# Altium PCB class-sensor.PcbDoc (part 2 of 2)
Units mm, origin at the board's own origin, x right, y up, seen from the top; angles counter-clockwise.
Board outline 152.4 x 135.3 mm, 2 copper layers (Top Layer, Bottom Layer); 48 components, 76 nets, 317 pads, 56 vias.
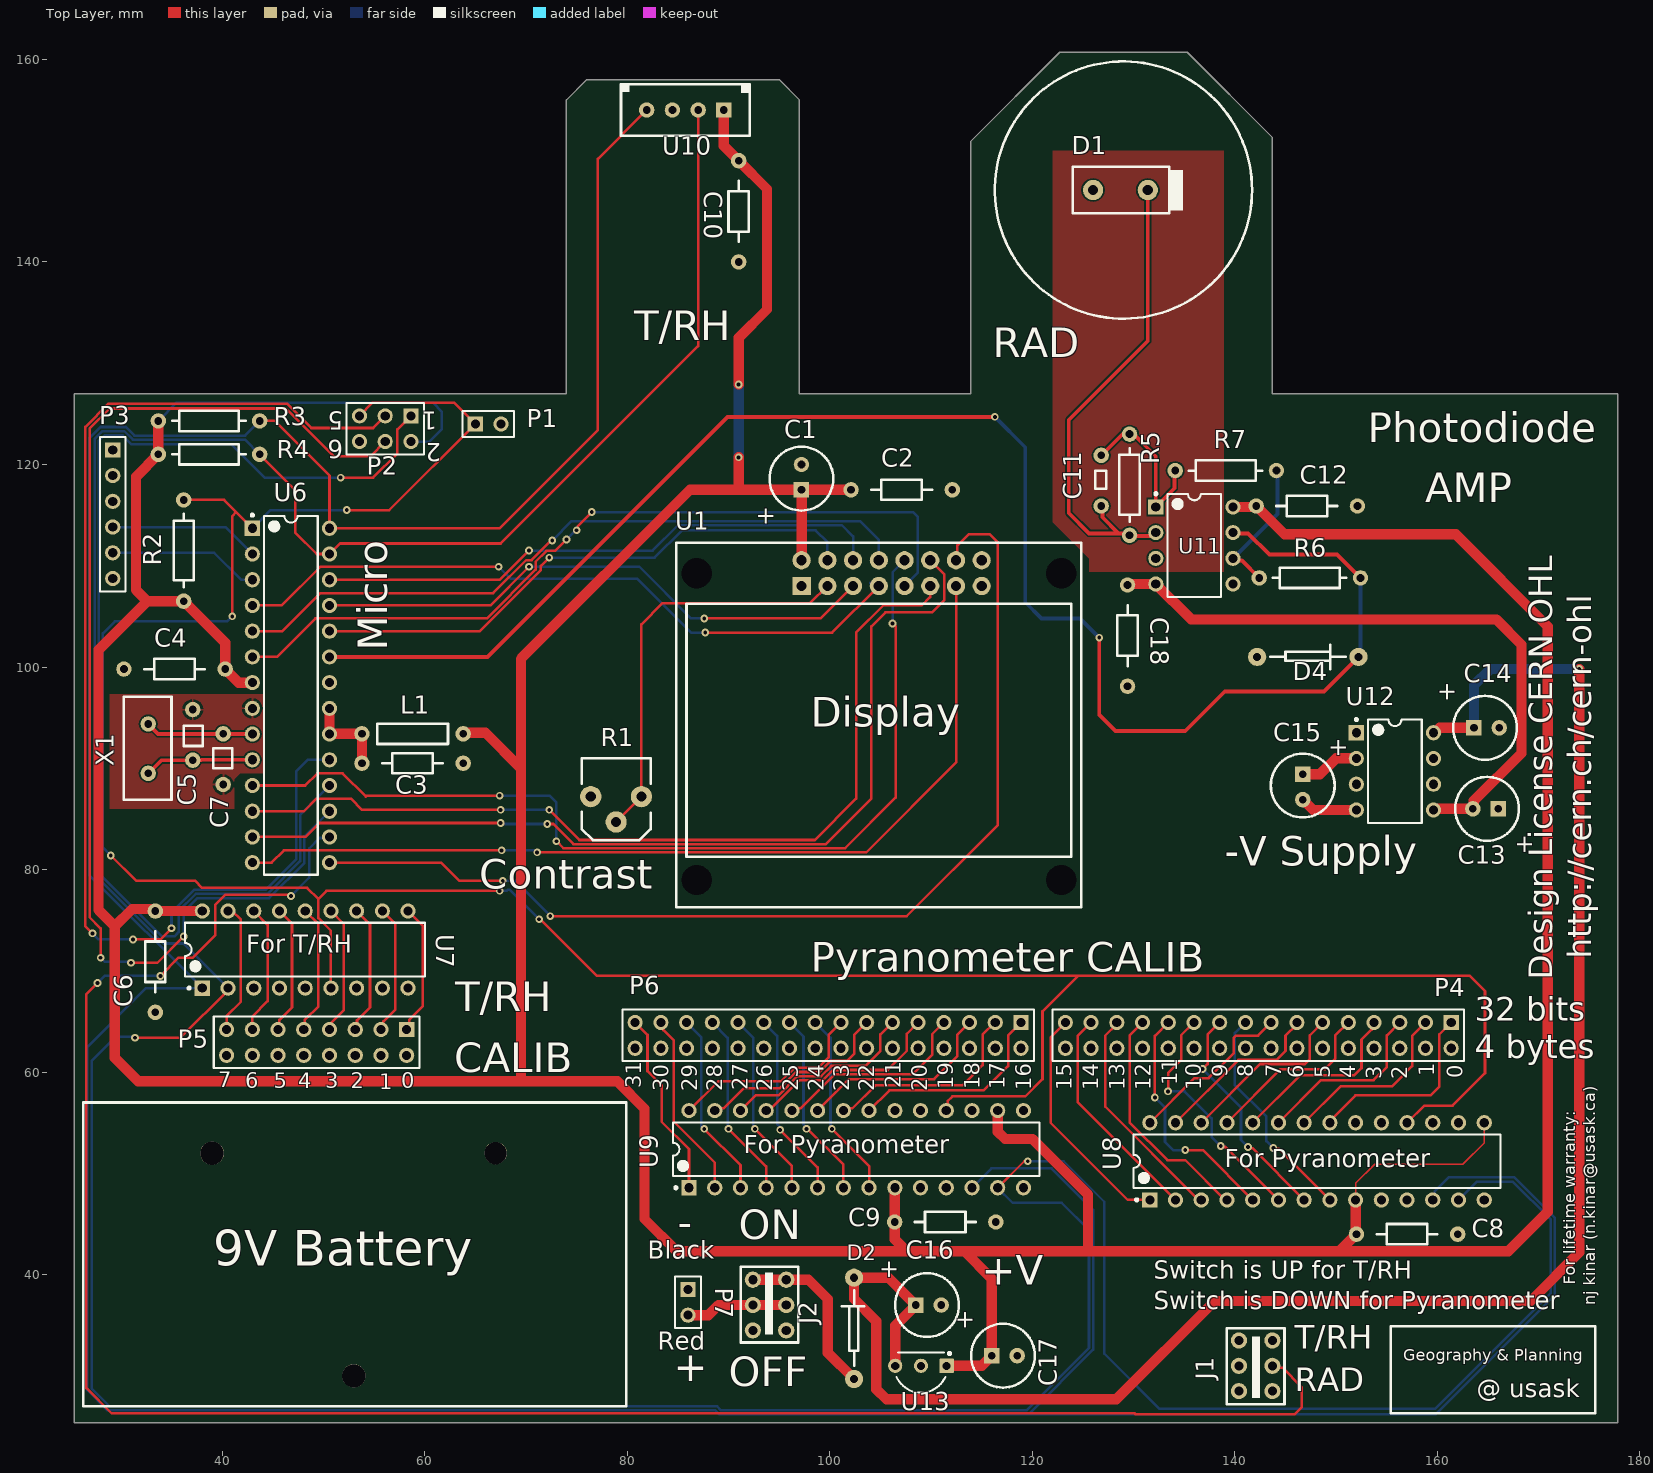
[diagram p0: Top Layer view]

## Part data (continued)
U8 U9: library part CMP-0186-00081-2, "16-Bit I/O Expander with Serial Interface, 28-Pin SPDIP, Extended Temperature", Case/Package=DIP, Frequency=1.7MHz, Manufacturer=Microchip, Max Operating Temperature=125°C, Max Supply Voltage=5.5V, Min Operating Temperature=-40°C, Min Supply Voltage=1.8V, Nominal Supply Current=1mA, Supplier Part Number 1=MCP23017-E/SP-ND, ComponentLink1Description="Manufacturer URL", ComponentLink1URL=http://www.microchip.com/, ComponentLink2Description=Datasheet, ComponentLink2URL=http://ww1.microchip.com/downloads/en/DeviceDoc/21952b.pdf, ComponentLink3Description="Package Specification", ComponentLink3URL=http://www.microchip.com/stellent/groups/techpub_sg/documents/packagingspec/en012702.pdf, ComponentLink4Description=https://datasheet.ciiva.com/1495/12179-1495877.pdf?src-supplier=Element14, ComponentLink4URL=https://datasheet.ciiva.com/1495/12179-1495877.pdf?src-supplier=Element14, ComponentLink5Description=https://datasheet.ciiva.com/3149/21952b-3149159.pdf?src-supplier=Avnet, ComponentLink5URL=https://datasheet.ciiva.com/3149/21952b-3149159.pdf?src-supplier=Avnet, ComponentLink6Description=https://datasheet.ciiva.com/16350/filehandler-aspxddocname-en023709-16350808.pdf?src-supplier=Future+Electronics, ComponentLink6URL=https://datasheet.ciiva.com/16350/filehandler-aspxddocname-en023709-16350808.pdf?src-supplier=Future+Electronics, ComponentLink7Description=https://datasheet.ciiva.com/18405/70046137-18405547.pdf?src-supplier=Allied+Electronics, ComponentLink7URL=https://datasheet.ciiva.com/18405/70046137-18405547.pdf?src-supplier=Allied+Electronics, ComponentLink8Description=https://datasheet.ciiva.com/1780/21952b-1780556.pdf?src-supplier=Digi-Key, ComponentLink8URL=https://datasheet.ciiva.com/1780/21952b-1780556.pdf?src-supplier=Digi-Key, DatasheetVersion="revB, Feb-2007", Interface=I2C,Serial, Lead Free="Lead Free", Manufacturer Part Number=MCP23017-E/SP, Max Frequency=1.7MHz, Mount="Through Hole,Surface Mount", Number of Bits=16, Number of Channels=1, Number of I/Os=16, Number of Pins=28, PackageDescription="28-Lead Skinny Plastic Dual In-Line (SP) - 300 mil Body [SPDIP]", PackageReference=SPDIP300-SP28, PackageVersion="revBB, Aug-2009", Packaging=Rail/Tube, Pricing 1="1=1.24000, 25=1.03000, 100=0.93730 (USD)", REACH SVHC="No SVHC", RevisionNote="URLs added.", RoHS=Yes, Stock 1=2595, Supplier 1=Digi-Key
U10: "Humidity Temperature Sensor 10 ~ 99% RH I²C ±3% RH 5s Through Hole", Manufacturer=Pimoroni, Manufacturer Part Number=COM1700, Supplier Part Number 1=1778-1179-ND, Pricing 1="1=3.76000 (USD)", RoHS=No, Stock 1=149, Supplier 1=Digi-Key
U11: library part CMP-0017-00928-2, "Dual Low-Noise JFET-Input General-Purpose Operational Amplifier, 7 to 36 V, -40 to 85 degC, 8-pin DIP (P8), Pb-Free (RoHS)", Case/Package=P, Dual Supply Voltage=9V, Input Bias Current=200pA, Input Offset Voltage (Vos)=6mV, Manufacturer="Texas Instruments", Max Dual Supply Voltage=18V, Max Operating Temperature=85°C, Min Dual Supply Voltage=3.5V, Min Operating Temperature=-40°C, Nominal Supply Current=5mA, Operating Supply Current=1.4mA, Package Quantity=50, Rating=Catalog, Supplier Part Number 1=296-14997-5-ND, Total Supply Voltage(Max)(+5V is 5, +/-5V is 10)=36, Total Supply Voltage(Min)(+5V is 5, +/-5V is 10)=7, Voltage Gain=106.02dB, Bandwidth=3MHz, CMRR(Min)(dB)=75, Code_JEDEC=MS-001, Common Mode Rejection Ratio=75dB, ComponentLink1Description="Manufacturer URL", ComponentLink1URL=http://www.ti.com/, ComponentLink2Description=Datasheet, ComponentLink2URL=http://www.ti.com/lit/ds/symlink/tl072.pdf, ComponentLink3Description="Package Specification", ComponentLink3URL=http://www.ti.com/litv/pdf/mpdi001b, ComponentLink4Description=https://datasheet.ciiva.com/26847/tl072ip-26847615.pdf?src-supplier=IIIC, ComponentLink4URL=https://datasheet.ciiva.com/26847/tl072ip-26847615.pdf?src-supplier=IIIC, ComponentLink5Description=https://datasheet.ciiva.com/2974/tl074-2974210.pdf?src-supplier=Avnet, ComponentLink5URL=https://datasheet.ciiva.com/2974/tl074-2974210.pdf?src-supplier=Avnet, ComponentLink6Description=https://datasheet.ciiva.com/7738/1847488-7738549.pdf?src-supplier=Element14, ComponentLink6URL=https://datasheet.ciiva.com/7738/1847488-7738549.pdf?src-supplier=Element14, ComponentLink7Description=https://datasheet.ciiva.com/26244/tl074-26244104.pdf?src-supplier=Avnet+Europe, ComponentLink7URL=https://datasheet.ciiva.com/26244/tl074-26244104.pdf?src-supplier=Avnet+Europe, ComponentLink8Description=https://datasheet.ciiva.com/1797/tl071a-1797084.pdf?src-supplier=Digi-Key, ComponentLink8URL=https://datasheet.ciiva.com/1797/tl071a-1797084.pdf?src-supplier=Digi-Key, DatasheetVersion=SLOS080J, Eco-Plan="Pb-Free (RoHS)", Gain Bandwidth Product=3MHz, GBW(Typ)(MHz)=3, Height=4.57mm, IIB(Max)(pA)=200, Iq per channel(Max)(mA)=2.5, Lead Free="Lead Free", Length=9.81mm, Manufacturer Part Number=TL072IP, Max I/O Voltage=6mV, Mounting Technology="Through Hole", Nominal Gain Bandwidth Product=3MHz, Number of Amplifiers=2, Number of Channels=2, Number of Circuits=2, Number of Elements=2, Number of Pins=8, Offset Drift(Typ)(uV/C)=18, Operating Supply Voltage=18V, PackageDescription="8-Pin Plastic In-Line, Body 9.59 x 6.35 mm, Pitch 2.54 mm", PackageReference=P0008A, PackageVersion="4040082/E, 04/2010", Packaging=Rail/Tube, PartNumber=TL072IP, Pricing 1="1=0.69000, 10=0.60700, 25=0.57040, 100=0.46550, 500=0.36800, 1000=0.29440, 2500=0.26680, 5000=0.24840 (USD)", Radiation Hardening=No, REACH SVHC="No SVHC", RoHS=Yes, Slew Rate=13V/µs, Slew Rate(Typ)(V/us)=13, Stock 1=1917, Sub Family="General Purpose Amplifier, High Supply Voltage Amplifier (>=30V)", Supplier 1=Digi-Key, Unity Gain Bandwidth Product=3MHz, Vio (25C)(Max)(mV)=6, Vn at 1kHz(Typ)(nV/rtHz)=18, Width=6.35mm
U12: library part CMP-0065-00002-3, "Switched Capacitor Voltage Converter, 8-pin MDIP, Pb-Free", Case/Package=PDIP, Frequency=10kHz, Manufacturer="Texas Instruments", Max Input Voltage=10V, Max Operating Temperature=85°C, Max Output Voltage=-1.5V, Min Input Voltage=1.5V, Min Operating Temperature=-40°C, Min Output Voltage=-10V, Operating Supply Current=200uA, Output Power=1.4W, PackageTopMarking=NSUZXYTTE#*LMC*7660IN, PowerWise=N, Quiescent Current=120uA, Supplier Part Number 1=LMC7660IN/NOPB-ND, Code_JEDEC=MS-001-BA, ComponentLink1Description="Datasheet URL", ComponentLink1URL=http://www.ti.com/general/docs/lit/getliterature.tsp?genericPartNumber=LMC7660&fileType=pdf, ComponentLink2Description=https://datasheet.ciiva.com/25627/0900766b80b14545-25627686.pdf?src-supplier=RSComponents, ComponentLink2URL=https://datasheet.ciiva.com/25627/0900766b80b14545-25627686.pdf?src-supplier=RSComponents, ComponentLink3Description=https://datasheet.ciiva.com/41458/001014234-da-01-en-ic-reg-switche-lmc7660in-nopb-pdip-8-tid-41458595.pdf?src-supplier=Conrad, ComponentLink3URL=https://datasheet.ciiva.com/41458/001014234-da-01-en-ic-reg-switche-lmc7660in-nopb-pdip-8-tid-41458595.pdf?src-supplier=Conrad, ComponentLink4Description=https://datasheet.ciiva.com/6598/lmc7660-6598038.pdf?src-supplier=Digi-Key, ComponentLink4URL=https://datasheet.ciiva.com/6598/lmc7660-6598038.pdf?src-supplier=Digi-Key, CompType="Switch Caps", Height=3.3mm, Lead Free="Lead Free", Length=9.27mm, Logic Function=Inverting, Manufacturer Part Number=LMC7660IN/NOPB, Max Supply Voltage=10V, Min Supply Voltage=1.5V, Mount="Through Hole", Number of Outputs=1, Number of Pins=8, Output Type=Adjustable, Output Voltage=-10V, PackageDescription="MDIP, .365 x .250 x .130in, 8 Lead, .100in Pitch", PackageReference=P0008A, Packaging=Rail/Tube, PinCount=8, Pricing 1="1=1.29000, 10=1.15100, 25=1.09200, 100=0.89700, 500=0.74100, 1000=0.58500, 2500=0.54600, 5000=0.51870 (USD)", Radiation Hardening=No, REACH SVHC="No SVHC", RoHS=Y, Stock 1=2555, Supplier 1=Digi-Key, Switching Frequency=10kHz, Termination="Through Hole", Weight=0.015521oz, Width=6.35mm
U13: library part CMP-0758-00015-2, "Single Output LDO, 100 mA, Fixed 5 V Output, 5.4 to 30 V Input, 3-Pin TO-92 (LP), RoHS, Tape and Reel", Case/Package=TO-92, Dropout Voltage=380mV, Input Bias Current=75uA, Manufacturer="Texas Instruments", Max Input Voltage=30V, Max Operating Temperature=125°C, Max Output Current=100mA, Max Output Voltage=5.05V, Min Input Voltage=5.4V, Min Operating Temperature=-40°C, Min Output Voltage=4.95V, Min Supply Voltage=2V, Nominal Output Voltage=5V, Output Capacitor Type=Non-Ceramic, Output Voltage Accuracy=1.4%, Package Quantity=1, Rating=Catalog, Supplier Part Number 1=296-20933-1-ND, Accuracy=1.4%, Accuracy (%)=1.4, ComponentLink1Description="Manufacturer URL", ComponentLink1URL=http://www.ti.com/, ComponentLink2Description=Datasheet, ComponentLink2URL=http://www.ti.com/lit/ds/symlink/lp2950-30.pdf, ComponentLink3Description="Package Specification", ComponentLink3URL=http://www.ti.com/lit/ml/msot002c/msot002c.pdf, ComponentLink4Description=https://datasheet.ciiva.com/2041/lp2951-2041968.pdf?src-supplier=Digi-Key, ComponentLink4URL=https://datasheet.ciiva.com/2041/lp2951-2041968.pdf?src-supplier=Digi-Key, ComponentLink5Description=https://datasheet.ciiva.com/3223/lp2951-33-3223814.pdf?src-supplier=Avnet, ComponentLink5URL=https://datasheet.ciiva.com/3223/lp2951-33-3223814.pdf?src-supplier=Avnet, ComponentLink6Description=https://datasheet.ciiva.com/1511/1864445-1511850.pdf?src-supplier=Element14, ComponentLink6URL=https://datasheet.ciiva.com/1511/1864445-1511850.pdf?src-supplier=Element14, ComponentLink7Description=https://datasheet.ciiva.com/46448/1445037-46448763.pdf?src-supplier=Element14, ComponentLink7URL=https://datasheet.ciiva.com/46448/1445037-46448763.pdf?src-supplier=Element14, ComponentLink8Description=https://datasheet.ciiva.com/2041/lp2951-2041966.pdf?src-supplier=Digi-Key, ComponentLink8URL=https://datasheet.ciiva.com/2041/lp2951-2041966.pdf?src-supplier=Digi-Key, ComponentLink9Description=https://datasheet.ciiva.com/2041/lp2951-2041967.pdf?src-supplier=Digi-Key, ComponentLink9URL=https://datasheet.ciiva.com/2041/lp2951-2041967.pdf?src-supplier=Digi-Key, Contact Plating=Tin,Matte, DatasheetVersion=SLVS582H, Fixed Output Options (V)=5, Height=3.68mm, Iout (Max) (A)=0.1, Iq (Typ) (mA)=0.075, Lead Free="Lead Free", Length=4.83mm, Manufacturer Part Number=LP2950-50LPRE3, Mounting Technology="Through Hole", Number of Outputs=1, Number of Pins=3, Number of Regulators=1, Output Current=100mA, Output Options="Fixed Output", Output Type=Fixed, Output Voltage=5V, PackageDescription="3-Pin Plastic Cylindrical Package, Body Dia 4.825 mm, Pitch 2.65 mm", PackageReference=LP0003A, PackageVersion=4040001-2/E, Packaging="Tape and Reel", Packing="Tape and Reel", PartNumber=LP2950-50LPRE3, Polarity=Positive, Pricing 1="1=0.47000, 10=0.40200, 100=0.29990, 500=0.23566, 1000=0.18210 (USD)", Quiescent Current=75uA, Radiation Hardening=No, REACH SVHC="No SVHC", RoHS=TRUE, Stock 1=99647, Supplier 1=Digi-Key, Termination="Through Hole", Vdo (Typ) (mV)=380, Vin (Max) (V)=30, Vin (Min) (V)=5.4, Vout (Max) (V)=5.05, Vout (Min) (V)=4.95, Width=3.43mm
X1: "CRYSTAL 8.0000MHZ 18PF T/H", ESR (Equivalent Series Resistance)=60R, Frequency=8MHz, Frequency Stability=50ppm, Frequency Tolerance=30ppm, Load Capacitance=18pF, Manufacturer=CTS, Max Operating Temperature=85°C, Min Operating Temperature=-40°C, Package Quantity=100, Supplier Part Number 1=CTX917-ND, ComponentLink1Description=https://datasheet.ciiva.com/859/008-0309-0-859649.pdf?src-supplier=Digi-Key, ComponentLink1URL=https://datasheet.ciiva.com/859/008-0309-0-859649.pdf?src-supplier=Digi-Key, ComponentLink2Description=https://datasheet.ciiva.com/3176/008-0309-0-3176342.pdf?src-supplier=Avnet, ComponentLink2URL=https://datasheet.ciiva.com/3176/008-0309-0-3176342.pdf?src-supplier=Avnet, ComponentLink3Description=https://datasheet.ciiva.com/4945/008-0309-0-32667-4945355.pdf?src-supplier=Mouser, ComponentLink3URL=https://datasheet.ciiva.com/4945/008-0309-0-32667-4945355.pdf?src-supplier=Mouser, Contact Plating=Copper,Tin,Silver, Height=0.145inch, Length=0.427inch, Manufacturer Part Number=ATS080B-E, Mount="Through Hole", Number of Pins=2, Packaging=Bulk, Pricing 1="1=0.38000, 10=0.31500, 50=0.28360, 100=0.25200, 500=0.23940, 1000=0.20160, 2500=0.18900, 5000=0.18270, 10000=0.17640 (USD)", RoHS=Yes, Stock 1=29517, Supplier 1=Digi-Key, Termination=Radial, Tolerance=30ppm, Width=0.177inch

## Free pads (board coordinates)
  round 2.3 hole 2.3: H(39,52) H(53,30)
  round 2.2 hole 2.2: H(67,52)

## Via types
v1: diameter 0.762, hole 0.381, Top Layer to Bottom Layer, tented both sides, 56 vias

## Nets (pads, with @x,y where several pads share a name; then routed paths per layer and width w, separated by ;. In a path a pad name is that pad's centre, name@x,y a point inside that pad or via, vN(x,y) a via of type N, cw(c..) or ccw(c..) an arc to the next point about the centre after c; other vN are vias at no path point)
5V: C1.1 C2.2 C4.2 C6.2 C8.2 C9.2 C10.2 C12.2 C17.1 L1.1 P2.2 R2.2 R3.2 R4.2 U1.2 U6.7 U7.18 U8.9 U8.15 U9.9 U9.16 U10.1 U11.8 U13.1 | length 579.5
  Top Layer w0.152: U8.9 151.92,49.02 153.8,50.9 162.5,50.9 164.637,53.037 164.637,53.163 164.62,53.18 U8.15
  Top Layer w1.016: C6.2 C6.2@33.563,75.9 ; C6.2@33.663,75.8 C6.2@33.563,75.9 ; R3.2 R4.2 31.5,118.8 31.5,107.6 32.6,106.5 ; U7.18 38.03,75.9 C6.2@33.563,75.9 ; U6.7 41.64,98.46 C4.2 40.3,102.4 R2.2 32.6,106.5 ; L1.1 63.897,93.497 64.256,93.497 64.259,93.5 66,93.5 69.5,90 ; U10.1 89.54,151.46 C10.2 93.8,147.2 93.8,135.3 91,132.5 v1(91,127.9) ; v1(91,120.7) 91,117.5 ; U1.2 97.22,117.28 C1.1@97,117.5 ; C2.2 C1.1@97,117.5 ; U9.9 106.42,45.22 C9.2 106.4,43.5 107.6,42.3 ; U13.1 115,31 C17.1 116,39.6 113.3,42.3 ; U9.16 116.58,54.12 117.3,53.4 120,53.4 125.5,47.9 125.5,42.3 ; U11.8 142.01,115.81 C12.2 144.9,113.1 161.8,113.1 170.9,104 170.9,46.2 167,42.3 150.3,42.3 ; U8.9 151.92,44.08 C8.2 150.3,42.3 ; 29.4,74.4 27.8,76 27.8,101.7 32.6,106.5 ; 29.4,74.4 29.4,61.4 31.7,59.1 69.5,59.1 ; 29.4,74.4 31.1,76.1 33.363,76.1 C6.2@33.563,75.9 ; 69.5,59.1 79,59.1 81.7,56.4 81.7,45.5 84.9,42.3 107.6,42.3 ; 69.5,59.1 69.5,90 ; 69.5,90 69.5,100.8 86.2,117.5 91,117.5 ; 91,117.5 C1.1@97,117.5 ; 107.6,42.3 113.3,42.3 ; 113.3,42.3 125.5,42.3 ; 125.5,42.3 150.3,42.3
  Bottom Layer w0.254: R3.2 35.5,126.1 60.8,126.1 61.7,125.2 61.7,123.5 60.46,122.26 P2.2
  Bottom Layer w1.016: v1(91,120.7) v1(91,127.9)
9V: C14.1 C16.1 D2.2 U12.8 U13.3 | length 178.9
  Top Layer w1.016: U13.3 106.46,34.96 C16.1 105.8,39.7 D2.2 102.4,37.6 104.6,35.4 104.6,28.7 105.6,27.7 128.3,27.7 138,37.4 169.2,37.4 174,42.2 v1(174,99.8) ; U12.8 159.741,93.51 160.231,94 C14.1
  Bottom Layer w1.016: C14.1 163.6,98.2 165.2,99.8 v1(174,99.8)
GND: C1.2 C2.1 C3.1 C4.1 C5.1 C6.1 C7.1 C8.1 C9.1 C10.1 C12.1 C13.1 C14.2 C16.2 C17.2 C18.1 D1.1 D4.1 J1.6 P1.2 P2.6 P3.1 P4.2 P4.4 P4.6 P4.8 P4.10 P4.12 P4.14 P4.16 P4.18 P4.20 P4.22 P4.24 P4.26 P4.28 P4.30 P4.32 P5.2 P5.4 P5.6 P5.8 P5.10 P5.12 P5.14 P5.16 P6.2 P6.4 P6.6 P6.8 P6.10 P6.12 P6.14 P6.16 P6.18 P6.20 P6.22 P6.24 P6.26 P6.28 P6.30 P6.32 P7.1 R1.3 U1.1 U6.8 U6.22 U7.3 U7.4 U7.5 U7.9 U8.10 U8.16 U8.17 U9.10 U9.15 U9.17 U10.3 U11.3 U11.5 U12.3 U13.2
NetC3_2: C3.2 L1.2 U6.20 U6.21 | length 8.6
  Top Layer w1.016: U6.21 U6.20 50.62,93.4 L1.2 C3.2
NetC5_2: C5.2 U6.10 X1.2 | length 10.3
  Top Layer w0.381: X1.2 34,90.8 C5.2 C5.2@36.9,91 ; 37.9,90.8 37.94,90.84 U6.10
NetC7_2: C7.2 U6.9 X1.1 | length 10.7
  Top Layer w0.381: X1.1@32.71,94.38 X1.1 33.68,93.4 C7.2 42.96,93.4 U6.9
NetC11_1: C11.1 D1.2 R5.1 U11.2 | length 48.2
  Top Layer w0.381: C11.1 126.912,115.788 126.912,114.788 128.5,113.2 ; D1.2 131.4,132.2 123.6,124.4 123.6,115.2 125.6,113.2 128.5,113.2 ; U11.2 131.84,112.92 130.08,112.92 129.8,113.2 128.5,113.2
NetC11_2: C11.2 R5.2 R7.1 U11.1 | length 16.7
  Top Layer w0.381: C11.2 128.888,122.988 129.588,122.988 129.8,123.2 132.19,120.81 U11.1 134.028,117.648 134.028,119.328 R7.1
NetC13_2: C13.2 C18.2 U11.4 U12.5 | length 63.7
  Top Layer w1.016: C18.2@129.303,108.003 C18.2 129.49,108.19 U11.4 135.68,104.7 165.8,104.7 168.3,102.2 168.3,91.5 163.597,86.797 163.597,86.097 C13.2 159.851,86 159.741,85.89 U12.5
NetC15_1: C15.1 U12.2 | length 6
  Top Layer w1.016: C15.1 148.4,89.4 150,91 151.96,91 U12.2
NetC15_2: C15.2 U12.4 | length 5.7
  Top Layer w1.016: C15.2 147.71,85.89 U12.4
NetD2_1: D2.1 J2.3 J2.6 | length 17.2
  Top Layer w1.016: J2.6 J2.3 97.9,39.5 99.8,37.6 99.8,32.3 D2.1
NetD4_2: D4.2 R6.2 U6.23 U11.7 | length 163.2
  Top Layer w0.381: U6.23 66.2,101 89.9,124.7 v1(116.3,124.7) ; v1(126.6,102.9) 126.6,95.3 128.2,93.7 135.1,93.7 139,97.6 148.8,97.6 D4.2 D4.2@152.3,101.1 ; U11.7 139.88,113.2 141.3,113.2 143.4,111.1 150.1,111.1 R6.2
  Bottom Layer w0.381: v1(116.3,124.7) 119.3,121.7 119.3,106.4 120.9,104.8 124.7,104.8 v1(126.6,102.9) ; D4.2 152.4,101.2 R6.2
NetJ1_5: J1.5 U6.16 | length 200
  Top Layer w0.254: v1(27.7,68.8) 26.6,67.7 26.6,65.8 26.6,28.8 29.1,26.3 130.1,26.3 130.2,26.2 145.9,26.2 146.6,26.9 146.6,28.9 144.681,30.819 143.881,30.819 J1.5 ; v1(33.9,69.5) 35.7,71.3 37.1,71.3 39.3,73.5 39.3,76.5 40.3,77.5 46.7,77.5 v1(46.8,77.4)
  Bottom Layer w0.254: v1(27.7,68.8) 28.4,69.5 v1(33.9,69.5) ; v1(46.8,77.4) 48.6,79.2 48.6,82.1 49.618,83.118 50.498,83.118 U6.16
NetJ2_2: J2.2 J2.5 P7.2 | length 10.1
  Top Layer w1.016: P7.2 88,36 89,37 J2.5 J2.2
NetP1_1: P1.1 P2.5 R2.1 U6.1 U7.6 U8.18 U9.18 | length 285.3
  Top Layer w0.254: v1(29,81.4) 31.5,78.9 37.3,78.9 38,78.2 48.4,78.2 49.5,77.1 ; R2.1 40.18,116.5 41.39,115.29 ; v1(41,105) 41,114.9 41.39,115.29 ; U6.1 41.39,115.29 ; U7.6 50.74,73.96 49.5,75.2 49.5,77.1 ; v1(52.3,115.5) 56.5,115.5 P1.1 62.9,126.1 54.86,126.1 P2.5 ; v1(67.4,77.9) 50.3,77.9 49.5,77.1 ; v1(71.3,75.1) 71.4,75.1 77,69.5 124.5,69.5 ; U9.18 111.646,56.346 111.646,57.146 112.1,57.6 119.3,57.6 121,59.3 121,66 124.5,69.5 ; U8.18 158.7,56.7 161.5,56.7 164.7,59.9 164.7,68 163.2,69.5 124.5,69.5
  Bottom Layer w0.254: v1(29,81.4) 28.213,82.187 28.213,103.313 29.4,104.5 40.5,104.5 v1(41,105) ; U6.1 44.78,115.5 v1(52.3,115.5) ; v1(67.4,77.9) 68.1,77.9 68.195,77.995 68.405,77.995 v1(71.3,75.1)
NetP2_1: P2.1 U6.18 | length 114.9
  Top Layer w0.254: v1(51.7,118.7) 54.9,118.7 57.3,121.1 57.3,123.46 P2.1
  Bottom Layer w0.254: U6.18 47.706,85.406 47.706,80.832 44.468,77.594 37.394,77.594 35.7,75.9 35.7,73.834 35.54,73.673 35.54,73.64 35.3,73.4 34.079,73.4 27.806,79.673 27.806,122.306 28.387,122.887 30.163,122.887 31.063,121.987 33.214,121.987 33.269,122.041 34.131,122.041 34.186,121.987 40.913,121.987 44.2,118.7 v1(51.7,118.7)
NetP2_3: P2.3 U6.19 | length 119.3
  Top Layer w0.254: v1(27.2,73.7) 26.5,74.4 26.5,123.7 28.8,126 46.4,126 48.8,123.6 54.9,123.6 P2.3 ; v1(31.2,73.1) 33.9,73.1 v1(35,74.2)
  Bottom Layer w0.254: v1(27.2,73.7) 27.8,73.1 v1(31.2,73.1) ; v1(35,74.2) 35,75.775 37.225,78 44.3,78 47.3,81 47.3,89.7 48.44,90.84 U6.19
NetP2_4: P2.4 U6.17 | length 117.2
  Top Layer w0.254: v1(28,71.3) 28,74.2 26.906,75.294 26.906,123.532 28.9,125.525 46.3,125.525 51.025,120.8 54.64,120.8 P2.4 ; v1(31,70.8) 33.6,70.8 v1(36.2,73.4)
  Bottom Layer w0.254: v1(28,71.3) 28.003,71.3 28.403,70.9 30.9,70.9 v1(31,70.8) ; v1(36.2,73.4) 36.2,75.825 37.562,77.187 44.637,77.187 48.113,80.663 48.113,83.273 U6.17
NetP3_4: P3.4 U6.2 | length 14.9
  Bottom Layer w0.254: P3.4 40.32,113.82 U6.2
NetP3_5: P3.5 U6.3 | length 14.9
  Bottom Layer w0.254: P3.5 39.22,111.28 41.88,108.62 U6.3
NetP4_1: P4.1 U8.21 | length 19.2
  Top Layer w0.254: U8.21 149.38,55.18 151.9,57.7 159.3,57.7 160.2,58.6 160.2,63.74 P4.1
NetP4_3: P4.3 U8.22 | length 17.8
  Top Layer w0.254: U8.22 150.44,58.6 155.5,58.6 157.5,60.6 157.5,63.58 P4.3
NetP4_5: P4.5 U8.23 | length 17.9
  Top Layer w0.254: U8.23 148.5,59.2 153.7,59.2 155,60.5 155,63.62 P4.5
NetP4_7: P4.7 U8.24 | length 18
  Top Layer w0.254: U8.24 146.46,59.7 151.8,59.7 152.5,60.4 152.5,63.2 153.502,64.202 153.502,64.662 P4.7
NetP4_9: P4.9 U8.25 | length 17.4
  Top Layer w0.254: U8.25 144.52,60.3 148.9,60.3 149.9,61.3 149.9,63.6 P4.9
NetP4_11: P4.11 U8.26 | length 17.5
  Top Layer w0.254: U8.26 142.48,60.8 146.9,60.8 147.4,61.3 147.4,63.64 P4.11
NetP4_13: P4.13 U8.27 | length 17.1
  Top Layer w0.254: U8.27 140.346,61.206 144.1,61.206 145,62.106 145,63.6 146.12,64.72 P4.13
NetP4_15: P4.15 U8.28 | length 17
  Top Layer w0.254: U8.28 136,59.4 137.4,59.4 139.9,61.9 139.9,63.4 140.1,63.6 142.28,63.6 P4.15
NetP4_17: P4.17 U8.8 | length 22.1
  Top Layer w0.254: v1(143.8,52.5) 143.855,52.445 144.315,52.445 U8.8
  Bottom Layer w0.254: P4.17 140,63.86 140,58.7 143.1,55.6 143.1,53.2 v1(143.8,52.5)
NetP4_19: P4.19 U8.7 | length 22.6
  Top Layer w0.254: v1(136.8,60.3) 137.3,60.8 137.3,63.7 P4.19 ; v1(141.3,52.6) 141.397,52.503 141.717,52.503 U8.7
  Bottom Layer w0.254: v1(136.8,60.3) 140.6,56.5 140.6,53.3 v1(141.3,52.6)
NetP4_21: P4.21 U8.6 | length 24.3
  Top Layer w0.254: v1(133.4,58.1) 133.4,59.9 134.7,61.2 134.7,63.64 P4.21 ; v1(138.6,52.7) 138.695,52.605 139.075,52.605 U8.6
  Bottom Layer w0.254: v1(133.4,58.1) 135.036,58.1 137.709,55.426 137.709,53.591 v1(138.6,52.7)
NetP4_23: P4.23 U8.5 | length 23.8
  Top Layer w0.254: v1(132.1,57.5) 132.1,63.58 P4.23 ; v1(135.1,52.3) 136.84,52.3 U8.5
  Bottom Layer w0.254: v1(132.1,57.5) 133.1,56.5 133.1,53.1 133.9,52.3 v1(135.1,52.3)
NetP4_25: P4.25 U8.4 | length 23.2
  Top Layer w0.254: P4.25 129.6,63.62 129.6,55.035 133.335,51.3 135.1,51.3 139.02,47.38 U8.4
NetP4_27: P4.27 U8.3 | length 22.1
  Top Layer w0.254: P4.27 128.34,64.74 127.2,63.6 127.2,56.6 136.42,47.38 U8.3
NetP4_29: P4.29 U8.2 | length 22.1
  Top Layer w0.254: P4.29 124.5,63.6 124.5,57.02 U8.2
NetP4_31: P4.31 U8.1 | length 23.5
  Top Layer w0.254: P4.31 121.8,63.44 121.8,55 129.42,47.38 U8.1
NetP5_1: P5.1 U7.10 | length 13
  Top Layer w0.254: P5.1 58.482,64.462 58.482,65.182 59.8,66.5 59.8,74.47 U7.10
NetP5_3: P5.3 U7.11 | length 12.8
  Top Layer w0.254: P5.3 55.918,64.438 55.918,65.018 57.1,66.2 57.1,74.63 U7.11
NetP5_5: P5.5 U7.12 | length 12.9
  Top Layer w0.254: P5.5 53.316,64.376 53.316,65.116 54.6,66.4 54.6,74.59 U7.12
NetP5_7: P5.7 U7.13 | length 12.8
  Top Layer w0.254: P5.7 50.838,64.438 50.838,64.938 52,66.1 52,74.65 U7.13
NetP5_9: P5.9 U7.14 | length 12.8
  Top Layer w0.254: P5.9 48.176,64.316 48.176,65.176 49.5,66.5 49.5,74.61 U7.14
NetP5_11: P5.11 U7.15 | length 12.8
  Top Layer w0.254: P5.11 45.656,64.336 45.656,65.156 46.9,66.4 46.9,74.67 U7.15
NetP5_13: P5.13 U7.16 | length 12.9
  Top Layer w0.254: P5.13 42.98,65.48 44.5,67 44.5,74.53 U7.16
NetP5_15: P5.15 U7.17 | length 13.1
  Top Layer w0.254: P5.15 40.44,65.54 41.85,66.95 41.85,75.05 40.99,75.91 U7.17
NetP6_1: P6.1 U9.21 | length 20.4
  Top Layer w0.254: U9.21 105.88,58.2 115.2,58.2 117.6,60.6 117.6,63.62 P6.1
NetP6_3: P6.3 U9.22 | length 20.4
  Top Layer w0.254: U9.22 101.556,56.416 102.216,56.416 104.5,58.7 113.1,58.7 115.1,60.7 115.1,63.7 116.3,64.9 P6.3
NetP6_5: P6.5 U9.23 | length 19.8
  Top Layer w0.254: U9.23 101.9,59.3 110.3,59.3 112.6,61.6 112.6,63.7 P6.5
NetP6_7: P6.7 U9.24 | length 19.8
  Top Layer w0.254: U9.24 96.486,56.426 97.126,56.426 100.5,59.8 108.2,59.8 110.1,61.7 110.1,63.74 P6.7
NetP6_9: P6.9 U9.25 | length 19.6
  Top Layer w0.254: U9.25 94,56.2 97,59.2 99.325,59.2 100.332,60.206 105.706,60.206 107.6,62.1 107.6,63.78 P6.9
NetP6_11: P6.11 U9.26 | length 19.6
  Top Layer w0.254: U9.26 92.68,57.7 94.925,57.7 96.832,59.606 99.157,59.606 100.163,60.613 103.513,60.613 105,62.1 105,63.72 P6.11
NetP6_13: P6.13 U9.27 | length 19.7
  Top Layer w0.254: U9.27 88.856,56.416 89.516,56.416 91.5,58.4 95.051,58.4 96.663,60.013 98.989,60.013 100.076,61.1 101.7,61.1 102.4,61.8 102.4,63.66 P6.13
NetP6_15: P6.15 U9.28 | length 19.9
  Top Layer w0.254: U9.28 89,59.1 95.176,59.1 96.495,60.419 98.82,60.419 99.9,61.499 99.9,63.7 P6.15
NetP6_17: P6.17 U9.8 | length 18.5
  Top Layer w0.254: v1(100.2,54.4) 103.88,50.72 U9.8
  Bottom Layer w0.254: P6.17 100.071,63.389 100.071,54.667 100.2,54.537 v1(100.2,54.4)
NetP6_19: P6.19 U9.7 | length 18.6
  Top Layer w0.254: v1(97.7,54.4) 97.8,54.4 101.34,50.86 U9.7
  Bottom Layer w0.254: P6.19 97.4,63.52 97.4,54.837 97.7,54.537 v1(97.7,54.4)
NetP6_21: P6.21 U9.6 | length 18.5
  Top Layer w0.254: v1(95.1,54.3) 98.8,50.6 U9.6
  Bottom Layer w0.254: P6.21 94.8,63.58 94.8,54.893 95.003,54.691 95.003,54.397 v1(95.1,54.3)
NetP6_23: P6.23 U9.5 | length 18.5
  Top Layer w0.254: v1(92.6,54.4) 96.26,50.74 U9.5
  Bottom Layer w0.254: P6.23 92.451,63.389 92.451,54.687 92.6,54.537 v1(92.6,54.4)
NetP6_25: P6.25 U9.4 | length 18.5
  Top Layer w0.254: v1(90,54.4) 93.72,50.68 U9.4
  Bottom Layer w0.254: P6.25 89.911,63.389 89.911,54.489 v1(90,54.4)
NetP6_27: P6.27 U9.3 | length 18.5
  Top Layer w0.254: v1(87.6,54.4) 91.18,50.82 U9.3
  Bottom Layer w0.254: P6.27 87.3,63.46 87.3,54.7 v1(87.6,54.4)
NetP6_29: P6.29 U9.2 | length 18.5
  Top Layer w0.254: P6.29 83.558,64.662 83.558,64.142 84.6,63.1 84.6,55.1 88.64,51.06 U9.2
NetP6_31: P6.31 U9.1 | length 18.5
  Top Layer w0.254: P6.31 82,63.68 82,60.1 83.4,58.7 83.4,55.1 86.1,52.4 U9.1
NetR1_1: R1.1 R1.2 U1.3 | length 40.5
  Top Layer w0.254: R1.2 R1.1 81.4,104.2 83.5,106.3 98.06,106.3 U1.3
NetR3_1: R3.1 U6.28 U7.1 U8.12 U9.12 U10.4 | length 413.9
  Top Layer w0.254: R3.1 45.2,124.3 50.6,118.9 U6.28 67.4,113.7 77.1,123.4 77.1,150.18 U10.4
  Bottom Layer w0.254: R3.1 42.254,122.854 31.346,122.854 30.5,123.7 28,123.7 26.9,122.6 26.9,79.43 U7.1 32.49,68.29 26.7,62.5 26.7,28.6 28.7,26.6 88.7,26.6 89.1,26.2 119.6,26.2 ; U9.12 115.96,50.5 121.9,50.5 126,46.4 126,32.6 119.6,26.2 ; U8.12 159.756,47.596 159.756,48.256 161.1,49.6 167.6,49.6 171.6,45.6 171.6,38 159.8,26.2 119.6,26.2
NetR4_1: R4.1 U6.27 U7.2 U8.13 U9.13 U10.2 | length 431.4
  Top Layer w0.254: v1(31.4,63.4) 35.9,63.4 40.58,68.08 U7.2 ; R4.1 47.2,117.5 47.2,113.3 49.34,111.16 U6.27 51.64,112.2 67.5,112.2 87,131.7 U10.2 ; U9.13 119.2,51.2 v1(119.55,51.2)
  Bottom Layer w0.254: v1(31.4,63.4) 31.3,63.5 29.5,63.5 27.106,61.106 27.106,28.768 28.868,27.006 88.868,27.006 89.268,26.606 119.432,26.606 125.594,32.768 125.594,44.406 122.9,47.1 118.06,47.1 U9.13 ; U7.2 36.17,72.7 34.205,72.7 27.4,79.505 27.4,122.525 28.168,123.294 30.332,123.294 31.177,122.448 42.252,122.448 R4.1 ; v1(119.55,51.2) 123.1,51.2 127.1,47.2 127.1,32.2 132.525,26.775 159.8,26.775 171.194,38.168 171.194,45.432 167.432,49.194 163.894,49.194 U8.13
NetR6_1: R6.1 R7.2 U11.6 | length 13.9
  Top Layer w0.381: U11.6 140.024,110.516 140.684,110.516 R6.1
  Bottom Layer w0.381: U11.6 144.2,115.12 144.2,119.3 R7.2
NetU1_4: U1.4 U6.24 | length 55.8
  Top Layer w0.254: U6.24 65.449,103.54 71.472,109.564 71.472,109.972 v1(72.3,110.8)
  Bottom Layer w0.254: v1(72.3,110.8) 82.7,110.8 85.4,113.5 98.6,113.5 99.76,112.34 U1.4
NetU1_5: U1.5 U6.25 | length 56.7
  Top Layer w0.254: U6.25 66.48,106.08 v1(70.3,109.9) ; v1(87.6,104.8) 99.1,104.8 U1.5
  Bottom Layer w0.254: v1(70.3,109.9) 81.2,109.9 86.3,104.8 v1(87.6,104.8)
NetU1_6: U1.6 U6.26 | length 56.7
  Top Layer w0.254: U6.26 67.42,108.62 v1(70.3,111.5)
  Bottom Layer w0.254: v1(70.3,111.5) 82.5,111.5 85,114 101.2,114 102.3,112.9 U1.6
NetU1_7: U1.7 U6.4 | length 69
  Top Layer w0.254: U6.4 45.88,106.08 49.7,109.9 v1(67.3,109.9) ; v1(87.7,103.4) 100.24,103.4 U1.7
  Bottom Layer w0.254: v1(67.3,109.9) 68.5,108.7 81,108.7 86.3,103.4 v1(87.7,103.4) ; U1.7@104.004,108.296 104.544,108.296 U1.7
NetU1_8: U1.8 U6.5 | length 69.1
  Top Layer w0.254: U6.5 45.94,103.54 49.7,107.3 66.766,107.3 70.026,110.56 70.552,110.56 72.491,112.5 v1(72.6,112.5)
  Bottom Layer w0.254: v1(72.6,112.5) 74.506,114.406 101.368,114.406 101.375,114.4 103,114.4 104.84,112.56 U1.8
NetU1_9: U1.9 U6.6 | length 79.8
  Top Layer w0.254: U6.6 45.4,101 49.2,104.8 66.134,104.8 70.96,109.626 70.96,110.394 72.026,111.46 72.86,111.46 v1(74,112.6) ; v1(75,113.5) 75.097,113.597 75.097,113.897 v1(76.5,115.3)
  Bottom Layer w0.254: v1(74,112.6) 74.9,113.5 v1(75,113.5) ; v1(76.5,115.3) 108.2,115.3 108.7,114.8 108.7,109.32 U1.9
NetU1_10: U1.10 U6.11 | length 95.5
  Top Layer w0.254: U6.11 48.2,88.3 49.4,89.5 51.9,89.5 54.2,87.2 54.3,87.3 v1(67.4,87.3) ; v1(73,82.8) 73.694,82.106 74,82.106 101.506,82.106 106.5,87.1 106.5,104 v1(106.2,104.3)
  Bottom Layer w0.254: v1(67.4,87.3) 72.3,87.3 73,86.6 v1(73,82.8) ; v1(106.2,104.3) 106.2,109.36 U1.10
NetU1_11: U1.11 U6.12 | length 89.8
  Top Layer w0.254: U6.12 48.06,85.76 49.3,87 52.7,87 53.8,85.9 v1(67.5,85.9) ; v1(72.3,85.9) 75.281,82.919 98.519,82.919 102.6,87 102.6,103.4 105.3,106.1 109.1,106.1 109.9,106.9 109.9,107.98 U1.11
  Bottom Layer w0.254: v1(67.5,85.9) v1(72.3,85.9)
NetU1_12: U1.12 U6.13 | length 94.2
  Top Layer w0.254: U6.13 48.22,83.22 49.6,84.6 v1(67.5,84.6) ; v1(72.1,84.5) 72.7,84.5 74.687,82.513 99.613,82.513 104.1,87 104.1,104 105.5,105.4 110.1,105.4 111.281,106.581 111.281,109.179 U1.12
  Bottom Layer w0.254: v1(67.5,84.6) 67.6,84.5 v1(72.1,84.5)
NetU1_13: U1.13 U6.14 | length 91.2
  Top Layer w0.254: U6.14 44.88,80.68 46.1,81.9 v1(67.6,81.9) ; v1(71.1,81.7) 103.6,81.7 112.5,90.6 112.5,107.96 U1.13
  Bottom Layer w0.254: v1(67.6,81.9) 70.9,81.9 v1(71.1,81.7)
NetU1_14: U1.14 U6.15 | length 106.1
  Top Layer w0.254: U6.15 61.62,80.68 63.4,78.9 v1(67.7,78.9) ; v1(72.4,75.4) 107.6,75.4 116.6,84.4 116.6,112.3 115.8,113.1 113.7,113.1 112.6,112 112.6,110.68 U1.14
  Bottom Layer w0.254: v1(67.7,78.9) 68.9,78.9 v1(72.4,75.4)
pads on no net: J1.1 J1.2 J1.3 J1.4 J2.1 J2.4 P3.2 P3.3 P3.6 U1.15 U1.16 U1.H1 U1.H2 U1.H3 U1.H4 U7.7 U7.8 U8.11 U8.14 U8.19 U8.20 U9.11 U9.14 U9.19 U9.20 U12.1 U12.6 U12.7

## Polygon pours and split planes (outlines as drawn)
no net on Top Layer "GND" (solid, pour order 0): 122,151 138.9,151 138.9,109.4 125.6,109.4 125.6,110.7 122,114.3
GND on Top Layer "GND" (solid, pour order 41): 28.9,97.3 44.1,97.3 44.1,89.5 41.8,89.5 41.2,88.9 41.2,86 28.9,86
no net on Top Layer "GND" (solid, pour order 39): 43.1,97.2
GND on Bottom Layer "GND" (solid, pour order 12): 122,151 139,151 139,125.7 144.2,120.5 157.3,120.5 157.3,101.7 152.2,96.6 145.9,96.6 133.5,90.8 133.5,68 79.9,68 75.8,63.9 75.8,48 82,41.8 88,41.8 88,28 69,28 69,67.2 77.9,76.1 125.6,76.1 125.6,124.2 122,127.8
GND on Bottom Layer "GND" (solid, pour order 20): 137,88 144,93 154,93 159,97 160,97 167.8,97 167.8,71.8 164,68 131,68 131,86 133,88
GND on Bottom Layer "GND" (solid, pour order 21): 81,67 77,63 77,28 176,28 176,67
GND on Bottom Layer "GND" (solid, pour order 8): 66,96.4 66,118.3 69.9,122.2 69.9,126.2 31.5,126.2 27.9,122.6 27.9,106.1 28.8,105.2 39.8,105.2 41,106.4 41,116.9 53.3,116.9 62,108.2 62,96.4
GND on Bottom Layer "GND" (solid, pour order 31): 93,119 96,122 116.4,122 116.4,77 83,77 83,70 71,70 71,100 66,105 66,116 69,119
GND on Bottom Layer "GND" (solid, pour order 45): 76,157 95,157 96,156 96,129 91,129 80,118 75,118 75,156
GND on Bottom Layer "GND" (solid, pour order 37): 29,102 40,102 63.2,102 63.2,98 48,98 41,98 40.9,98.1 29,98.1
GND on Bottom Layer "GND" (solid, pour order 35): 66,90 66,76 74,68 74,65 62,65 61,66 61,78 60,79 56,79 56,90
GND on Bottom Layer "GND" (solid, pour order 33): 98,79 115,79 115,74 98,74
no net on Bottom Layer "GND" (solid, pour order 29): 81,123
no net on Bottom Layer "GND" (solid, pour order 27): 78.6,119.1
GND on Bottom Layer "GND" (solid, pour order 23): 30,70 61,70 76,55 76,54 31,54 30,55
no net on Bottom Layer "GND" (solid, pour order 18): 132,80
no net on Bottom Layer "GND" (solid, pour order 16): 134,90
no net on Bottom Layer "GND" (solid, pour order 14): 132.5,89.6
GND on Bottom Layer "GND" (solid, pour order 10): 55.9,97.5 64.5,97.5 64.5,89 64,88.5 55.9,88.5
GND on Bottom Layer "GND" (solid, pour order 6): 52.4,99.8 63.2,99.8 66,97 66,88.5 62,88.5 62,96.9 52.4,96.9
GND on Bottom Layer "GND" (solid, pour order 2): 28.9,97.3 41.4,97.3 45.9,97.3 48.4,99.8 53.3,99.8 53.3,96.9 49.4,96.9 49.4,94.9 44,89.5 41.8,89.5 41.2,88.9 41.2,86 28.9,86

## Silkscreen, mask and mechanical layers (free items; w line width, h text height)
Top Overlay:
  circle w0.254: c129,147.1 r12.7
  lines w0.254: 101.2,36.9 103.4,36.9 ; 149.4,99.8 149.4,102.2 ; 26.3,27 79.9,27 79.9,57 26.3,57 26.3,27 ; 155.4,26.3 155.4,34.9 175.6,34.9 175.6,26.3 155.4,26.3
  text "T/RH" at 80.7,131.3 h5
  text "RAD" at 116.1,129.6 h5
  text "Photodiode" at 153.1,121.2 h5
  text "AMP" at 158.8,115.3 h5
  text "Micro" at 57.3,101.6 h5 r90
  text "Display" at 98.1,93.1 h5
  text "-V Supply" at 139,79.4 h5
  text "Contrast" at 65.4,77.1 h5
  text "For T/RH" at 42.4,71.2 h3
  text "http://cern.ch/cern-ohl" at 175.989,71.2 h4 r90
  text "Design License CERN OHL" at 172.148,69.1 h4 r90
  text "Pyranometer CALIB" at 98.1,68.9 h5
  text "T/RH" at 63,65 h5
  text "32 bits" at 163.7,64.3 h4
  text "4 bytes" at 163.7,60.6 h4
  text "1" at 159.7,59.6 h1.52 r90
  text "9" at 139.3,59.5 h1.52 r90
  text "8" at 141.8,59.5 h1.52 r90
  text "7" at 144.6,59.5 h1.52 r90
  text "6" at 146.8,59.4 h1.52 r90
  text "5" at 149.4,59.4 h1.52 r90
  text "4" at 151.9,59.4 h1.52 r90
  text "0" at 162.5,59.4 h1.52 r90
  text "3" at 154.5,59.3 h1.52 r90
  text "2" at 157,59.3 h1.52 r90
  text "CALIB" at 62.9,59 h5
  text "11" at 134.3,58.7 h1.52 r90
  text "7" at 39.6,58.5 h1.52
  text "6" at 42.3,58.4 h1.52
  text "5" at 45.1,58.4 h1.52
  text "4" at 47.5,58.4 h1.52
  text "3" at 50.2,58.4 h1.52
  text "2" at 52.7,58.4 h1.52
  text "0" at 57.7,58.4 h1.52
  text "31" at 81.4,58.4 h1.52 r90
  text "21" at 107,58.4 h1.52 r90
  text "1" at 55.5,58.3 h1.52
  text "19" at 112.2,58.3 h1.52 r90
  text "18" at 114.8,58.3 h1.52 r90
  text "17" at 117.3,58.3 h1.52 r90
  text "27" at 91.9,58.2 h1.52 r90
  text "16" at 119.9,58.2 h1.52 r90
  text "15" at 123.9,58.2 h1.52 r90
  text "14" at 126.5,58.2 h1.52 r90
  text "13" at 129.1,58.2 h1.52 r90
  text "12" at 131.7,58.2 h1.52 r90
  text "10" at 136.7,58.2 h1.52 r90
  text "30" at 84.1,58.1 h1.52 r90
  text "29" at 86.9,58.1 h1.52 r90
  text "28" at 89.4,58.1 h1.52 r90
  text "26" at 94.3,58.1 h1.52 r90
  text "25" at 96.9,58.1 h1.52 r90
  text "24" at 99.4,58.1 h1.52 r90
  text "23" at 101.9,58.1 h1.52 r90
  text "22" at 104.4,58.1 h1.52 r90
  text "20" at 109.6,58.1 h1.52 r90
  text "For Pyranometer" at 91.5,51.4 h3
  text "For Pyranometer" at 139,50 h3
  text "-" at 85,42.8 h5
  text "ON" at 91,42.5 h5
  text "Black" at 82,41 h3
  text "9V Battery" at 39.1,39.7 h6
  text "Switch is UP for T/RH" at 132,39 h3
  text "For lifetime warranty:" at 174,39 h2 r90
  text "+V" at 115,38 h5
  text "nj kinar (n.kinar@usask.ca)" at 176,37 h2 r90
  text "Switch is DOWN for Pyranometer" at 132,36 h3
  text "Red" at 83,32 h3
  text "T/RH" at 145.9,31.9 h4
  text "Geography & Planning" at 156.6,31.1 h2
  text "+" at 84.6,28.5 h5
  text "OFF" at 90,28 h5
  text "RAD" at 145.9,27.7 h4
  text "@ usask" at 163.9,27.3 h3
Mechanical 1:
  lines w0.254: 25.4,25.4 25.4,127 74,127 74,156 76,158 95,158 97,156 97,127 113.9,127 113.9,152 122.6,160.7 135.3,160.7 143.8,152.2 143.8,127 177.8,127 177.8,25.4 25.4,25.4

## Text inside footprints (layer, text, board x,y; h text height)
C1: Top Overlay "+" at 94.7,116.2 h3.05 r180
C13: Top Overlay "+" at 167.3,83.5 h3.05 r270
C14: Top Overlay "+" at 162.3,96.5 h3.05 r90
C15: Top Overlay "+" at 149.2,90.7 h3.05
C16: Top Overlay "+" at 107.2,39.5 h3.05 r90
C17: Top Overlay "+" at 114.7,34.5 h3.05 r90
P2: Top Overlay "6" at 51.94,123 h3.05 r180; Top Overlay "5" at 51.94,125.8 h3.05 r180; Top Overlay "2" at 61.64,122.7 h3.05 r180; Top Overlay "1" at 61.24,125.8 h3.05 r180